# Altium PCB PCB_Facto.PcbDoc (part 2 of 2)
Units mil, origin at the board's own origin, x right, y up, seen from the top; angles counter-clockwise.
Board outline 2860 x 2480 mil, 2 copper layers (Top Layer, Bottom Layer); 83 components, 110 nets, 404 pads, 112 vias.
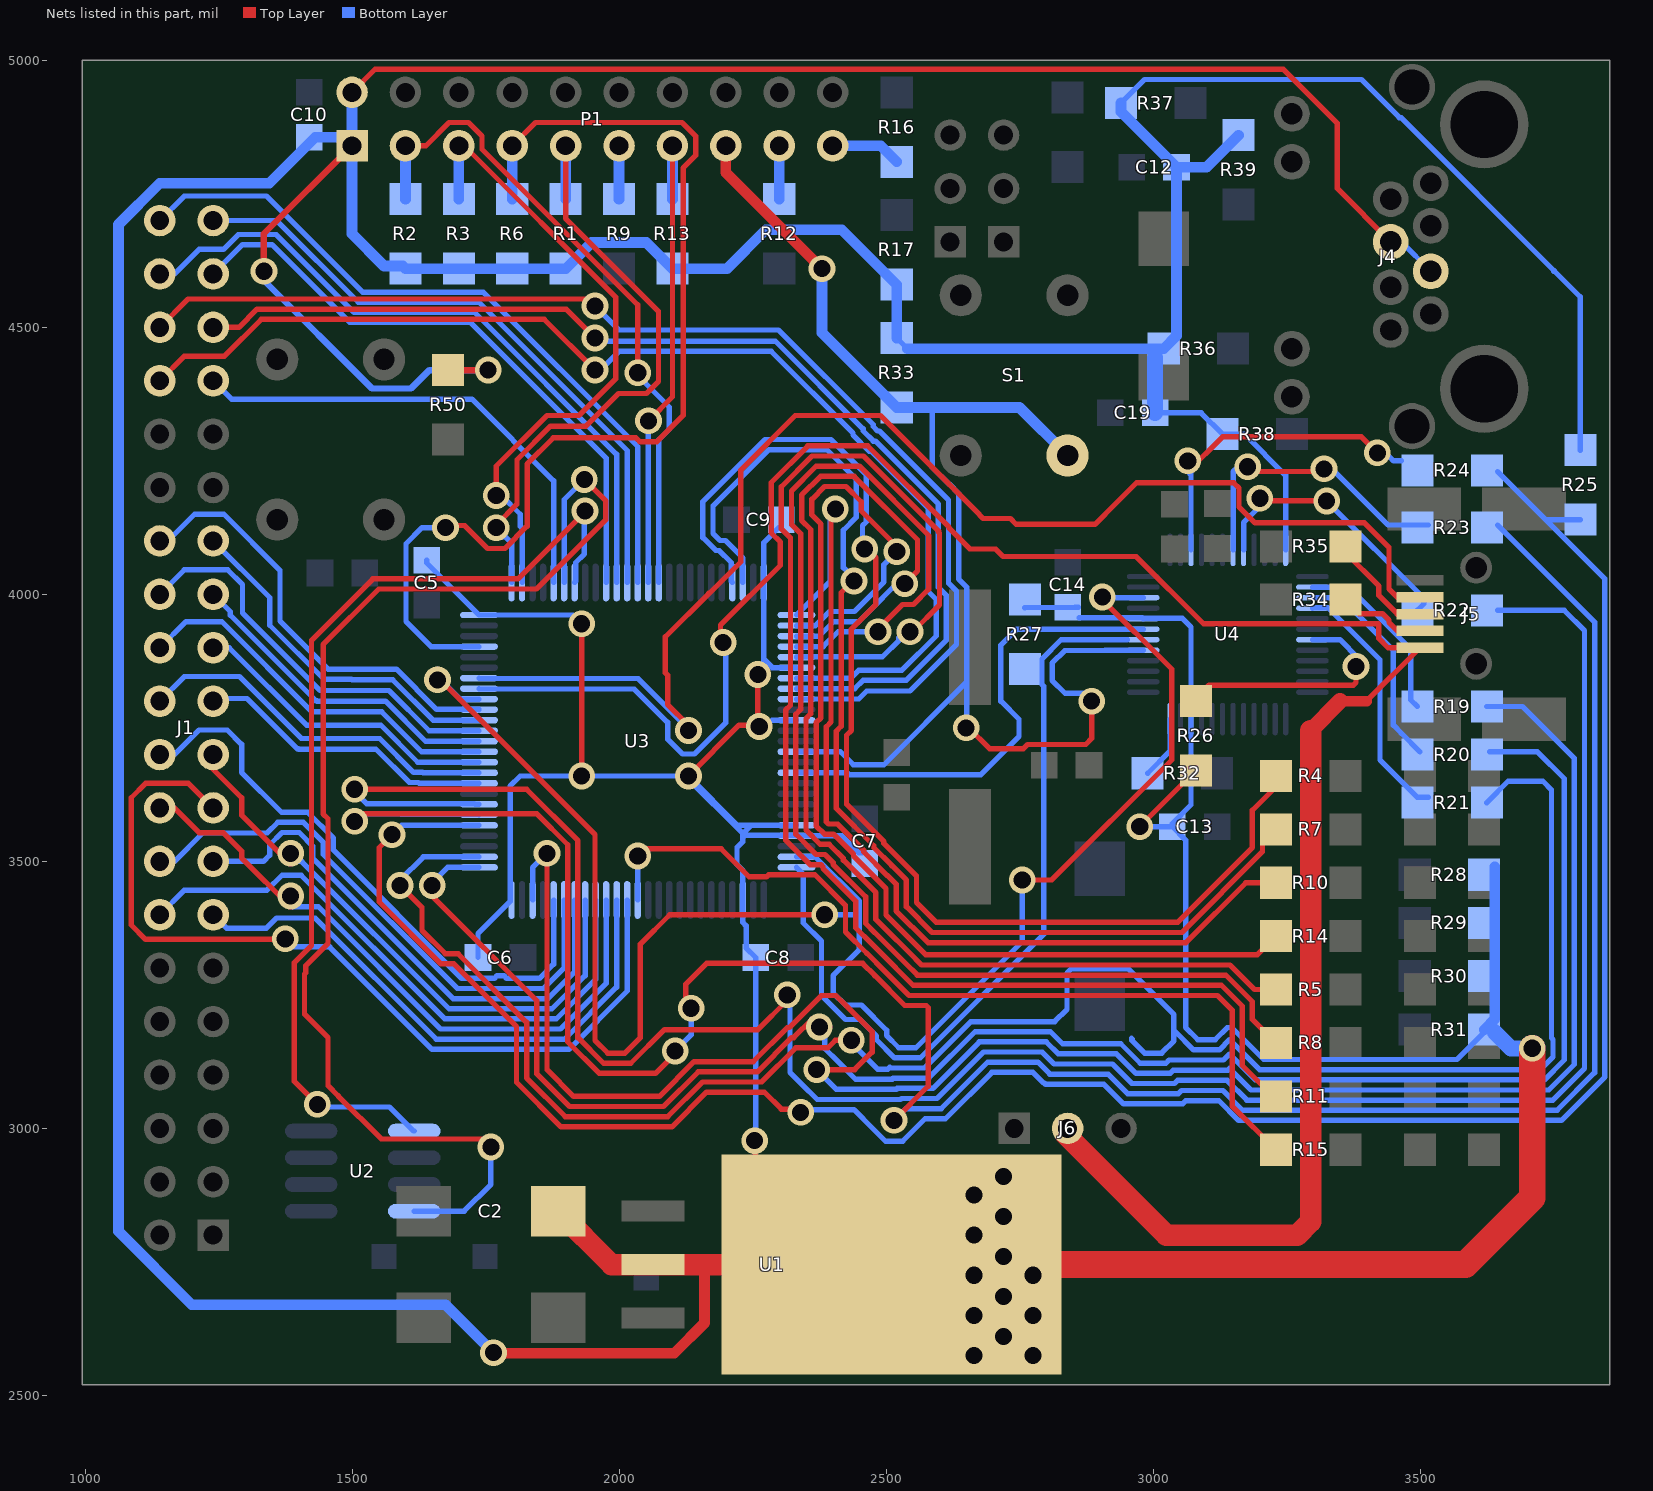
[diagram p2: the nets of this part, all layers, seen from the top]

## Via types
v1: diameter 50, hole 32, Top Layer to Bottom Layer, 111 vias
v2: diameter 50/50 (per signal layer), hole 32, Top Layer to Bottom Layer, 1 vias

## Nets (pads, with @x,y where several pads share a name; then routed paths per layer and width w, separated by ;. In a path a pad name is that pad's centre, name@x,y a point inside that pad or via, vN(x,y) a via of type N, cw(c..) or ccw(c..) an arc to the next point about the centre after c; other vN are vias at no path point) (continued)
NetJ5_1: J5.1 J6.2 U3.68 | length 4222.4
  Top Layer w10: v1(2195,3910) 2190,3915 2190,3942.52 2302,4054.52 2302,4097.87 2285,4114.87 2285,4209.39 2353.61,4278 2465.73,4278 2617.95,4125.78 2617.95,4123.92 2656.87,4085 2705.15,4085 2719.15,4071 2968.39,4071 3094.39,3945 3421.82,3945 3422.71,3944.11 3422.71,3917.29 3440,3900 J5.1@3500,3900 3400,3800
  Top Layer w20: 3350,3800 3400,3800
  Top Layer w30: 3295,3745 3350,3800
  Top Layer w40: J6.2@2835,2990 3025,2800 3270,2800 3295,2825 3295,3745
  Bottom Layer w10: U3.68@1737.76,3823.43 1738.25,3822.93 2028.33,3822.93 2091,3760.26 2091,3728.85 2118.85,3701 2141.15,3701 2200,3759.85 2200,3905.15 2194.85,3910.31 2194.85,3912.13 2195,3912.13 v1(2195,3910)
NetJ5_2: J5.2 R34.1 | length 166.9
  Top Layer w10: R34.1@3360,3990 3386,3964 3429.69,3964 3441.71,3951.98 3441.71,3947.35 3457.56,3931.5 J5.2@3500,3931.5
NetJ5_3: J5.3 R35.1 | length 209.9
  Top Layer w10: R35.1@3360,4090 3360,4078 3422.71,4015.29 3422.71,3997.85 3457.56,3962.99 J5.3@3500,3962.99
NetJ5_4: J5.4 U3.69 | length 2586
  Top Layer w10: v1(2130,3745) 2130,3754.85 2091,3793.85 2091,3848.54 2086.69,3852.85 2086.69,3920.59 2168.11,4002 2168.87,4002 2228,4061.13 2228,4233 2330,4335 2489.34,4335 2674.95,4149.39 2674.95,4148.79 2681.74,4142 2732.85,4142 2743.85,4131 2891,4131 2931,4171 2931,4171.15 2968.85,4209 3150.8,4209 3161,4198.8 3161,4163.85 3190.85,4134 3395.8,4134 3441.71,4088.09 3441.71,4010.34 3457.56,3994.49 J5.4@3500,3994.49
  Bottom Layer w10: U3.69@1737.76,3843.11 1738.44,3842.43 2035.7,3842.43 2130,3748.13 v1(2130,3745)
NetP1_3: P1.3 R2.1 U3.90 | length 1268.3
  Top Layer w10: P1.3@1600,4840 1638.44,4840 1681.97,4883.53 1718.03,4883.53 1743.53,4858.03 1743.53,4833.5 2035,4542.02 v1(2035,4415)
  Bottom Layer w10: v1(2035,4415) 2030,4415 2094,4351 2094,4308.85 2074.37,4289.22 U3.90@2074.37,4022.24
  Bottom Layer w20: R2.1@1600,4740 P1.3@1600,4840
NetP1_5: P1.5 R3.1 U3.77 | length 1199.4
  Top Layer w10: P1.5@1700,4840 1710.15,4840 1994,4556.15 1994,4403.85 1925.15,4335 1865,4335 1770,4240 v1(1770,4185)
  Bottom Layer w10: v1(1770,4185) 1780,4185 1815,4150 1815,4127.37 1818.46,4123.9 U3.77@1818.46,4022.24
  Bottom Layer w20: R3.1@1700,4740 P1.5@1700,4840
NetP1_7: P1.7 R6.1 U3.72 | length 2034.9
  Top Layer w10: v1(1675,4125) 1679,4129 1710.85,4129 1753.85,4086 1786.15,4086 1828,4127.85 1828,4244.26 1876.74,4293 2031.85,4293 2038.85,4286 2071.15,4286 2120,4334.85 2120,4798.44 2143.53,4821.97 2143.53,4858.03 2118.03,4883.53 1843.53,4883.53 P1.7@1800,4840
  Bottom Layer w10: v1(1675,4125) 1631.2,4125 1601,4094.8 1601,3949.2 1648.04,3902.17 U3.72@1737.76,3902.17
  Bottom Layer w20: R6.1@1800,4740 P1.7@1800,4840
NetP1_9: P1.9 R1.1 U3.76 | length 1182.2
  Top Layer w10: v1(1770,4125) 1770,4129.85 1809,4168.85 1809,4252.13 1871.87,4315 1938.13,4315 1999.13,4376 2051.15,4376 2074,4398.85 2074,4529.89 1900,4703.89 P1.9@1900,4840
  Bottom Layer w10: v1@1777.5,4107.5 1787.5,4107.5 1798.78,4096.22 U3.76@1798.78,4022.24
  Bottom Layer w20: R1.1@1900,4740 P1.9@1900,4840
NetP1_11: P1.11 R9.1 | length 100
  Bottom Layer w20: R9.1@2000,4740 P1.11@2000,4840
NetP1_13: P1.13 R13.2 U3.89 | length 936.1
  Top Layer w10: v1(2055,4325) 2100,4370 P1.13@2100,4840
  Bottom Layer w10: U3.89@2055,4022.56 v1(2055,4325)
  Bottom Layer w20: R13.2@2100,4740 P1.13@2100,4840
NetP1_15: P1.15 R33.2 S1.2 U3.14 U4.29 | length 2630.8
  Top Layer w10: v1(2650,3750) 2654.85,3750 2693.85,3711 2757.2,3711 2765.2,3719 2874,3719 2885,3730 v1(2885,3800)
  Top Layer w20: P1.15@2200,4840 2200,4790 v1(2380,4610)
  Bottom Layer w10: U3.14@2332.24,3705.32 2414.53,3705.32 2438.85,3681 2496.15,3681 2651,3835.85 ; 2586.5,4348.5 2586.5,4237.84 2617.84,4206.5 2618.5,4206.5 2636,4189 2636,4028.85 2651,4013.85 2651,3835.85 ; v1(2650,3750) 2651,3751 2651,3835.85 ; v1(2885,3800) 2870.15,3814.85 2835,3814.85 2811,3838.85 2811,3871.15 2834.85,3895 2910,3895 2910.47,3895.47 U4.29@2981.54,3895.47
  Bottom Layer w20: v1(2380,4610) 2380,4490 R33.2@2520,4350 2750,4350 S1.2@2840,4260
NetP1_17: P1.17 R12.2 | length 100
  Bottom Layer w20: R12.2@2300,4740 P1.17@2300,4840
NetP1_19: P1.19 R16.2 | length 132.4
  Bottom Layer w20: P1.19@2400,4840 2490,4840 R16.2@2520,4810
NetR4_2: R4.2 U3.97 | length 2309.1
  Top Layer w10: v1(2460,4085) 2461,4086 2464,4086 2481,4069 2481,3981 2469,3969 2468.85,3969 2435,3935.15 2435,3745.15 2426,3736.15 2426,3607.09 2496,3537.09 2496,3533.85 2518.85,3511 2519,3511 2557,3473 2557,3423.11 2594.18,3385.93 3045.93,3385.93 3186,3526 3186,3595.8 3230,3639.8 R4.2@3230,3660
  Bottom Layer w10: U3.97@2212.17,4022.24 2210.39,4024.02 2210.39,4059.19 2187.57,4082 2181.33,4082 2157,4106.33 2157,4173.67 2273.33,4290 2396.87,4290 2463,4223.87 2463,4135.98 2456,4128.98 2456,4089 v1(2460,4085)
NetR5_2: R5.2 U3.3 | length 2294.1
  Top Layer w10: v1(2535,4020) 2559,4044 2559,4102.26 2440.26,4221 2377.22,4221 2342,4185.78 2342,4138.48 2359,4121.48 2359,3776.63 2350,3767.63 2350,3558.74 2376.82,3531.92 2393.69,3531.92 2420,3505.61 2420,3502.37 2481,3441.37 2481,3391.52 2487.52,3385 2487.63,3385 2555,3317.63 2555,3317.52 2566.52,3306 3144,3306 3190,3260 R5.2@3230,3260
  Bottom Layer w10: U3.3@2332.24,3921.85 2374.98,3921.85 2402.13,3949 2448.85,3949 2468.85,3969 2469,3969 2520,4020 v1@2540,4020
NetR7_2: R7.2 U3.98 | length 2198.7
  Top Layer w10: v1(2440,4025) 2438,4025 2416,4003 2416,3753.02 2407,3744.02 2407,3599.22 2477,3529.22 2477,3525.98 2510.98,3492 2511.13,3492 2538,3465.13 2538,3415.24 2586.31,3366.93 3053.8,3366.93 3205,3518.13 3205,3538.13 3226.87,3560 R7.2@3230,3560
  Bottom Layer w10: U3.98@2231.85,4022.24 2231.85,4068.15 2199,4101 2189.2,4101 2176,4114.2 2176,4165.8 2281.2,4271 2389,4271 2444,4216 2444,4143.85 2421.15,4121 2421,4121 2420,4120 2420,4050 2440,4030 v1(2440,4025)
NetR8_2: R8.2 U3.4 | length 2495.5
  Top Layer w10: v1(2485,3930) 2485,3935 2531,3981 2551.15,3981 2580,4009.85 2580,4105.15 2579.95,4105.21 2579.95,4110.04 2449.99,4240 2369.35,4240 2323,4193.65 2323,4130.61 2340,4113.61 2340,3784.5 2331,3775.5 2331,3550.87 2368.95,3512.92 2385.82,3512.92 2401,3497.74 2401,3494.5 2462,3433.5 2462,3383.65 2479.65,3366 2479.76,3366 2536,3309.76 2536,3309.65 2558.65,3287 3136.13,3287 3186,3237.13 3186,3204 R8.2@3230,3160
  Bottom Layer w10: U3.4@2332.24,3902.17 2382.17,3902.17 2410,3930 v1@2490,3930
NetR10_2: R10.2 U3.1 | length 1818.5
  Top Layer w10: v1@2397,4147 2397,3760.89 2388,3751.89 2388,3574.48 2392.56,3569.92 2409.43,3569.92 2458,3521.35 2458,3518.11 2503.11,3473 2503.26,3473 2519,3457.26 2519,3407.37 2578.44,3347.93 3061.67,3347.93 3173.74,3460 R10.2@3230,3460
  Bottom Layer w10: U3.1@2332.24,3961.22 2395,4023.98 2395,4150 v1(2405,4160)
NetR11_2: R11.2 U3.5 | length 2712.2
  Top Layer w10: v1(2545,3930) 2550,3930 2600,3980 2600,4115 2598.95,4116.05 2598.95,4117.91 2457.86,4259 2361.48,4259 2304,4201.52 2304,4122.74 2321,4105.74 2321,3792.37 2312,3783.37 2312,3539.87 2357.95,3493.92 2377.95,3493.92 2382,3489.87 2382,3486.63 2443,3425.63 2443,3375.78 2471.78,3347 2471.89,3347 2517,3301.89 2517,3301.78 2550.78,3268 3128.26,3268 3167,3229.26 3167,3118 3225,3060 R11.2@3230,3060
  Bottom Layer w10: U3.5@2332.24,3882.48 2332.93,3883.17 2493.32,3883.17 2524,3913.85 2524,3919 2535,3930 v1(2545,3930)
NetR14_2: R14.2 U3.2 | length 2128.4
  Top Layer w10: v1(2520,4080) 2520,4090 2453.5,4156.5 2453.5,4173.41 2424.91,4202 2385.09,4202 2361,4177.91 2361,4148.85 2378,4131.85 2378,3768.76 2369,3759.76 2369,3566.61 2384.69,3550.92 2401.56,3550.92 2439,3513.48 2439,3510.24 2500,3449.24 2500,3399.5 2574.5,3325 3195,3325 R14.2@3230,3360
  Bottom Layer w10: U3.2@2332.24,3941.54 2367.8,3941.54 2394.26,3968 2440.98,3968 2496,4023.02 2496,4056 v1(2520,4080)
NetR15_2: R15.2 U3.38 | length 1653.8
  Top Layer w10: v1(2035,3510) 2048.45,3523.45 2191.39,3523.45 2243.85,3471 2276.15,3471 2280.08,3474.92 2366.83,3474.92 2424,3417.76 2424,3367.91 2463.91,3328 2464.02,3328 2498,3294.02 2498,3293.91 2542.91,3249 3120.39,3249 3148,3221.39 3148,3042 R15.2@3230,2960
  Bottom Layer w10: U3.38@2035,3427.76 v1(2035,3510)
NetR19_1: R19.1 U3.48 | length 3728.1
  Top Layer w10: v1(1865,3515) 1865,3110 1915,3060 2075.5,3060 2140.5,3125 2251.26,3125 2315.26,3189 2319.15,3189 2336,3205.85 2336,3206.15 2378.85,3249 2405.85,3249 2423.85,3231 2424.15,3231 2474,3181.15 2474,3142.85 2441.15,3110 v1(2370,3110) v1@2379.69,3110
  Bottom Layer w10: U3.48@1838.15,3427.76 1838.15,3488.15 v1(1865,3515) ; v1@2379.69,3110 v1(2370,3110) 2407,3073 2519.26,3073 2521.26,3075 2587.63,3075 2674.63,3162 2800.05,3162 2822.52,3139.53 2931.58,3139.53 2968.11,3103 3031.89,3103 3037.89,3109 3139.76,3109 3143.19,3112.42 3183.61,3072 3740.89,3072 3789,3120.11 3789,3692.87 3691.87,3790 R19.1@3625,3790
NetR19_2: R19.2 U4.2 | length 344.8
  Bottom Layer w10: U4.2@3298.46,4013.58 3366.42,4013.58 3482.5,3897.5 3482.5,3802.5 R19.2@3495,3790
NetR20_1: R20.1 U3.51 | length 3442.8
  Top Layer w10: v1(1650,3455) 1650,3435 1846,3239 1846,3102.13 1907.13,3041 2083.37,3041 2148.37,3106 2259.13,3106 2323.13,3170 2327.02,3170 2362.02,3205 v1@2375,3205 ; v1(2375,3190) v1@2395,3190
  Bottom Layer w10: v1@1645,3440 1645,3455 1678.78,3488.78 U3.51@1737.76,3488.78 ; v1(2375,3190) 2385,3180 2385,3150 2386,3149 2386.15,3149 2409,3126.15 2409,3126 2443,3092 2511.39,3092 2513.39,3094 2579.76,3094 2666.76,3181 2807.92,3181 2830.39,3158.53 2939.45,3158.53 2975.98,3122 3024.02,3122 3030.02,3128 3131.89,3128 3143.19,3139.29 3191.48,3091 3733.02,3091 3770,3127.98 3770,3655 3720,3705 R20.1@3630,3705
NetR20_2: R20.2 U4.3 | length 403.5
  Bottom Layer w10: U4.3@3298.46,3993.9 3351.1,3993.9 3450,3895 3450,3755.2 3465.2,3740 3465,3740 R20.2@3500,3705
NetR21_1: R21.1 U3.52 | length 3800.6
  Top Layer w10: v1(1590,3455) 1631,3414 1631,3370.87 1674.87,3327 1698.61,3327 1827,3198.61 1827,3094.26 1899.26,3022 2091.24,3022 2156.24,3087 2267,3087 2331,3151 2391.15,3151 2405.15,3165 v1(2435,3165)
  Bottom Layer w10: v1@1590,3465 1633.46,3508.46 U3.52@1737.76,3508.46 ; v1(2435,3165) 2435,3160 2484,3111 2503.52,3111 2506.81,3114.29 2508.11,3113 2571.89,3113 2658.89,3200 2815.79,3200 2838.76,3222.96 2838.76,3291 2846.96,3299.2 2953.04,3299.2 3039,3213.24 3039,3163.85 ; R21.1@3625,3610 3665,3650 3730,3650 3746,3634 3746,3169.15 3749,3166.15 3749,3133.85 3725.15,3110 3199.35,3110 3143.19,3166.16 3124.02,3147 3075.98,3147 3042,3180.98 3040.98,3180.98 3039,3179 3039,3163.85 ; 2983.85,3141 2961,3163.85 2961,3167.47 2959.63,3168.83 2959.63,3165.21 2983.85,3141 ; 2983.85,3141 3016.15,3141 ; 2983.85,3141 3016.15,3141 ; 3016.15,3141 3039,3163.85 ; 3016.15,3141 3039,3163.85
NetR21_2: R21.2 U4.4 | length 473.7
  Bottom Layer w10: U4.4@3298.46,3974.21 3299.15,3974.9 3327.61,3974.9 3425,3877.51 3425,3690 3495,3620 R21.2@3515,3620
NetR22_1: R22.1 U3.57 | length 4303.3
  Top Layer w10: v1(1505,3635) 1827.02,3635 1923,3539.02 1923,3169.98 1970.98,3122 2022,3122 2085,3185 2260,3185 2315,3240 v1(2315,3250)
  Bottom Layer w10: v1(1505,3635) 1505,3630 1521,3614 1521.15,3614 1527.15,3608 1729.46,3608 1730.57,3606.89 U3.57@1737.76,3606.89 ; v1(2315,3250) 2320,3245 2320,3104.85 2355.85,3069 2356.15,3069 2371.15,3054 2527.13,3054 2529.13,3056 2595.5,3056 2682.5,3143 2792.18,3143 2814.65,3120.53 2923.71,3120.53 2960.24,3084 3039.76,3084 3045.76,3090 3138.74,3090 3175.74,3053 3748.76,3053 3808,3112.24 3808,3932 3770,3970 R22.1@3645,3970
NetR22_2: R22.2 U4.44 | length 521.5
  Top Layer w10: v1(3200,4180) 3205,4175 v1(3325,4175)
  Bottom Layer w10: U4.44@3169.53,4083.46 3169.53,4134.53 3200,4165 v1(3200,4180) ; v1(3325,4175) 3506.87,3993.13 3506.87,3981.87 R22.2@3495,3970
NetR23_1: R23.1 U3.56 | length 4721.2
  Top Layer w10: v1(1505,3575) 1505,3580 1514,3589 1846.15,3589 1904,3531.15 1904,3162.11 1963.11,3103 2068,3103 v1@2120,3155 ; v1(2135,3225) 2125,3225 2125,3270 2164,3309 2456.15,3309 2479,3286.15 2479,3286.04 2535.04,3230 2575,3230 2579,3226 2579,3079 v1(2515,3015)
  Bottom Layer w10: v1(1505,3575) 1519,3589 1591.15,3589 1592.26,3587.89 1737.07,3587.89 U3.56@1737.76,3587.2 ; v1(2105,3145) 2135,3175 v1(2135,3225) ; v1(2515,3015) 2537,3037 2603.37,3037 2690.37,3124 2784.31,3124 2806.78,3101.53 2915.84,3101.53 2952.37,3065 3047.63,3065 3053.63,3071 3130.87,3071 3167.87,3034 3756.63,3034 3827,3104.37 3827,3948 R23.1@3645,4130
NetR23_2: R23.2 U4.43 | length 596.7
  Top Layer w10: v1@3159,4239 v1(3177.08,4239) ; v1@3172.5,4237.5 3180,4230 3320,4230 3325,4235 v1(3320,4235)
  Bottom Layer w10: U4.43@3149.84,4083.46 3150,4083.62 3150,4230 3159,4239 v1(3177.08,4239) ; v1(3320,4235) 3335,4235 3440,4130 R23.2@3515,4130
NetR24_1: R24.1 R25.1 U3.55 | length 4311.4
  Top Layer w10: v1(1575,3550) 1551,3526 1551,3424 1667,3308 1690.74,3308 1808,3190.74 1808,3086.39 1891.39,3003 2099.11,3003 2164.11,3068 2271.85,3068 2303.85,3036 v1@2334,3036
  Bottom Layer w10: v1(1575,3550) 1592.52,3567.52 U3.55@1737.76,3567.52 ; v1@2335,3035 2440,3035 2476,2999 2476,2998.85 2498.85,2976 2531.15,2976 2573.15,3018 2611.24,3018 2698.24,3105 2775,3105 2795,3085 2796.44,3085 2798.91,3082.53 2907.97,3082.53 2944.5,3046 3055.5,3046 3061.5,3052 3123,3052 3160,3015 3764.5,3015 3846,3096.5 3846,4029 3735,4140 ; R24.1@3645,4230 3735,4140 ; R25.1@3800,4140 3735,4140
  other v1: 2340,3030
NetR24_2: R24.2 U4.39 | length 654.2
  Top Layer w10: v1(3065,4250) 3065,4230 3130,4295 3390,4295 v1(3420,4265)
  Bottom Layer w10: v1(3065,4250) 3065,4230 3071.1,4223.9 ; U4.39@3071.1,4083.46 3071.1,4223.9 ; v1@3071.1,4243.9 3071.1,4223.9 ; v1@3420.19,4265.19 3427.69,4257.69 3442.6,4257.69 3450.29,4250 3464.71,4250
NetR26_1: R26.1 U4.7 | length 467.7
  Top Layer w10: R26.1@3075,3800 3105,3830 3375,3830 3380,3835 v1(3380,3865)
  Bottom Layer w10: U4.7@3298.46,3915.16 3349.84,3915.16 3385,3880 3385,3870 v1(3380,3865)
NetR27_1: R27.1 U3.25 U4.30 | length 1515.5
  Bottom Layer w10: U3.25@2332.24,3488.78 2345,3476.02 2345,3384.8 2379,3350.8 2379,3248.98 2423.98,3204 2451.15,3204 2482,3173.15 2482,3165.98 2515.98,3132 2564.02,3132 2795,3362.98 2795,3827.98 2792,3830.98 2792,3879.02 2828.13,3915.16 U4.30@2951.7,3915.16
NetR32_2: R32.2 U4.24 | length 118.8
  Bottom Layer w10: R32.2@2990,3665 3031.73,3706.73 U4.24@3031.73,3766.54
NetU2_1: U2.1 U3.82 | length 1871.1
  Top Layer w10: v1@1425,3055 v1(1435,3045) 1392,3088 1392,3310.43 1424,3342.43 1424,3914 1539,4029 1810.87,4029 1936.2,4154.33 v1(1936.2,4156)
  Bottom Layer w10: v1(1435,3045) 1440,3040 1570.02,3040 1615.02,2995 U2.1@1616.46,2995 ; U3.82@1916.89,4022.24 1918.67,4024.02 1918.67,4059.19 1935,4075.52 v1@1935,4156
NetU2_4: U2.4 U3.81 | length 2418.1
  Top Layer w10: v1(1760,2965) 1760,2980 1555,2980 1474,3061 1474,3061.15 1455,3080.15 1455,3169.85 1411,3213.85 1411,3288.98 1413.59,3291.57 1413.59,3305.15 1455,3346.57 1455,3579.85 1446,3588.85 1446,3906 1550,4010 1845.36,4010 1975.2,4139.85 1975.2,4174.8 v2(1935,4215)
  Bottom Layer w10: U2.4@1616.46,2845 1710,2845 1760,2895 1760,2980 v1(1760,2965) ; U3.81@1897.2,4022.24 1897.2,4177.2 v2(1935,4215)
NetU3_16: U3.16 U4.31 | length 912.4
  Bottom Layer w10: U3.16@2332.27,3665.92 2427.05,3665.92 2430.98,3662 2677.15,3662 2749,3733.85 2749,3766.15 2715,3800.15 2715,3905 2745,3935 2910.5,3935 2910.66,3934.84 U4.31@2981.54,3934.84
NetU3_24: U3.24 U3.67 U4.34 | length 3384.4
  Top Layer w10: v1@1662.5,3842.5 1955,3550 1955,3164.85 1978.85,3141 2011.15,3141 2040,3169.85 2040,3345 2095,3400 v1(2385,3400) ; v1(2755,3465) 2810,3465 3035,3690 3035,3860 v1@2900,3995
  Bottom Layer w10: v1(1660,3840) v1@1660,3860 ; v1@1663.17,3843.17 1702.59,3803.74 U3.67@1737.76,3803.74 ; U3.24@2332.24,3508.46 2367.41,3508.46 2450,3425.87 2450,3400 ; v1(2385,3400) 2450,3400 ; v1(2755,3465) 2755,3349.85 2556.15,3151 2523.85,3151 2501,3173.85 2501,3183.85 2453.85,3231 2423.85,3231 2401,3253.85 2401,3286.15 2450,3335.15 2450,3400 ; v1@2900,3993.9 U4.34@2981.54,3993.9
  other v1: 2905,3995
PC12: J1.33 U3.80 | length 905.4
  Bottom Layer w10: J1.33@1240,4400 1274.5,4365.5 1724.5,4365.5 1877.52,4212.48 U3.80@1877.52,4022.24
PC13: J1.34 U3.7 | length 2203.9
  Top Layer w10: J1.34@1140,4400 1186.09,4446.09 1261.09,4446.09 1330,4515 1860,4515 v1(1955,4420)
  Bottom Layer w10: v1(1955,4420) 1965,4420 2000,4455 2285,4455 2438,4302 2438,4298.46 2468.46,4268 2472,4268 2579,4161 2579,4005.24 2594,3990.24 2594,3922.13 2529.87,3858 2449.11,3858 2434.22,3843.11 U3.7@2332.24,3843.11
PC14: J1.35 U3.8 | length 2092.1
  Top Layer w10: J1.35@1240,4500 1288.13,4500 1322.13,4534 1901,4534 v1(1955,4480)
  Bottom Layer w10: v1@1965,4474 2292.87,4474 2457,4309.87 2457,4306.33 2476.33,4287 2479.87,4287 2598,4168.87 2598,4013.11 2613,3998.11 2613,3914.26 2537.74,3839 2456.98,3839 2441.4,3823.43 U3.8@2332.24,3823.43
PC15: J1.36 U3.9 | length 2275.7
  Top Layer w10: J1.36@1140,4500 1193,4553 1942,4553 v1(1955,4540)
  Bottom Layer w10: v1(1955,4540) 2000,4495 2298.74,4495 2476,4317.74 2476,4314.2 2484.2,4306 2487.74,4306 2617,4176.74 2617,4020.98 2632,4005.98 2632,3906.39 2544.61,3819 2463.85,3819 2448.85,3804 2332.5,3804 U3.9@2332.24,3803.74
PD4: J1.37 U3.85 | length 1157.2
  Bottom Layer w10: J1.37@1240,4600 1295,4655 1350,4655 1496,4509 1721.94,4509 1975.94,4255 U3.85@1975.94,4022.24
PD5: J1.38 U3.86 | length 1296.8
  Bottom Layer w10: J1.38@1140,4600 1167.54,4600 1213.63,4646.09 1259.22,4646.09 1287.13,4674 1357.87,4674 1503.87,4528 1729.81,4528 1995.63,4262.18 U3.86@1995.63,4022.24
PD6: J1.39 U3.87 | length 1200.8
  Bottom Layer w10: J1.39@1240,4700 1358.74,4700 1511.74,4547 1737.68,4547 2015.32,4269.37 U3.87@2015.32,4022.24
PD7: J1.40 U3.88 | length 1362.8
  Bottom Layer w10: J1.40@1140,4700 1186,4746 1339.61,4746 1519.61,4566 1745.55,4566 2035,4276.55 U3.88@2035,4022.24
PE8: J1.17 U3.39 | length 1701
  Top Layer w10: J1.17@1240,3600 1193.91,3646.09 1113.63,3646.09 1086.63,3619.09 1086.63,3380.91 1113.63,3353.91 1371.09,3353.91 1385,3340 1385,3345 v1(1375,3355)
  Bottom Layer w10: v1(1375,3355) 1385,3345 1385,3340 1458.11,3340 1650.11,3148 1906.09,3148 2015.32,3257.23 U3.39@2015.32,3427.76
PE10: J1.18 U3.41 | length 1243.4
  Top Layer w10: J1.18@1140,3600 1167.54,3600 1213.63,3553.91 1258.55,3553.91 1293.37,3519.09 1293.37,3506.63 1385,3415 v1(1385,3435)
  Bottom Layer w10: v1(1385,3435) 1385,3420 1390,3415 1436.85,3415 1665.85,3186 1890.35,3186 1975.94,3271.59 U3.41@1975.94,3427.76
PE12: J1.19 U3.43 | length 1134.3
  Top Layer w10: J1.19@1240,3700 1240,3672.46 1293.37,3619.09 1293.37,3586.63 1385,3495 1384.39,3495 1385,3495.61 v1(1385,3515)
  Bottom Layer w10: v1(1385,3515) 1385,3500 1405.59,3500 1681.59,3224 1874.61,3224 1936.57,3285.96 U3.43@1936.57,3427.76
PE15: J1.20 U3.46 | length 1128.6
  Bottom Layer w10: J1.20@1140,3700 1167.54,3700 1213.63,3746.09 1266.37,3746.09 1293.37,3719.09 1293.37,3666.63 1368,3592 1416.89,3592 1465,3543.89 1465,3521.2 1705.2,3281 1766.8,3281 1771.8,3286 1784.2,3286 1789.2,3281 1851,3281 1877.52,3307.52 U3.46@1877.52,3427.76
T1_CH1: J1.13 U3.40 | length 1071.6
  Bottom Layer w10: J1.13@1240,3400 1265.05,3374.95 1339.8,3374.95 1358.85,3394 1430.98,3394 1657.98,3167 1898.22,3167 1995.63,3264.41 U3.40@1995.63,3427.76
T1_CH2: J1.14 U3.42 | length 1137.9
  Bottom Layer w10: J1.14@1140,3400 1186.09,3446.09 1340.93,3446.09 1368.85,3474 1404.72,3474 1673.72,3205 1882.48,3205 1956.26,3278.78 U3.42@1956.26,3427.76
T1_CH3: J1.15 U3.44 | length 1008.1
  Bottom Layer w10: J1.15@1240,3500 1334.24,3500 1346,3511.76 1346,3531.15 1368.85,3554 1401.15,3554 1427,3528.15 1427,3505.46 1689.46,3243 1866.74,3243 1916.89,3293.15 U3.44@1916.89,3427.76
T1_CH4: J1.16 U3.45 | length 1072.9
  Bottom Layer w10: J1.16@1140,3500 1167.54,3500 1220.54,3553 1340.98,3553 1360.98,3573 1409.02,3573 1446,3536.02 1446,3513.33 1697.33,3262 1858.87,3262 1897.2,3300.33 U3.45@1897.2,3427.76
T3_CH1: J1.25 U3.63 | length 615.7
  Bottom Layer w10: J1.25@1240,4000 1272,3968 1272,3961.13 1432.13,3801 1434,3801 1435,3800 1562.48,3800 1637.48,3725 U3.63@1737.76,3725
T3_CH2: J1.26 U3.64 | length 772.8
  Bottom Layer w10: J1.26@1140,4000 1186.09,4046.09 1267.04,4046.09 1295,4018.13 1295,3965 1440,3820 1569.35,3820 1644.66,3744.69 U3.64@1737.76,3744.68
T3_CH3: J1.27 U3.65 | length 667.2
  Bottom Layer w10: J1.27@1240,4100 1346,3994 1346,3942.13 1447.13,3841 1499,3841 1500,3840 1576.22,3840 1651.85,3764.37 U3.65@1737.76,3764.37
T3_CH4: J1.28 U3.66 | length 825.7
  Bottom Layer w10: J1.28@1140,4100 1155,4100 1205,4150 1260,4150 1365,4045 1365,3950 1455,3860 1583.09,3860 1658.35,3784.74 1737.07,3784.74 U3.66@1737.76,3784.06
T4_CH1: J1.21 U3.59 | length 565.6
  Bottom Layer w10: J1.21@1240,3800 1245,3805 1303.13,3805 1397.13,3711 1399,3711 1400,3710 1545,3710 1607.37,3647.63 1624.24,3647.63 1625.61,3646.26 U3.59@1737.76,3646.26
T4_CH2: J1.22 U3.60 | length 691.5
  Bottom Layer w10: J1.22@1140,3800 1186.09,3846.09 1288.91,3846.09 1405,3730 1551.87,3730 1615.24,3666.63 1632.11,3666.63 1632.8,3665.94 U3.60@1737.76,3665.94
T4_CH3: J1.23 U3.61 | length 586.6
  Bottom Layer w10: J1.23@1240,3900 1270,3900 1415,3755 1553.74,3755 1623.11,3685.63 U3.61@1737.76,3685.63
T4_CH4: J1.24 U3.62 | length 719
  Bottom Layer w10: J1.24@1140,3900 1189,3949 1256,3949 1425,3780 1555.61,3780 1630.29,3705.32 U3.62@1737.76,3705.32
VCC: C2.1 C5.2 C6.2 C7.2 C8.2 C9.2 C10.2 C12.2 C13.2 C14.2 C19.2 J4.4 J4.5 P1.1 P1.2 R1.2 R2.2 R3.2 R6.2 R13.1 R17.1 R25.2 R26.2 R27.2 R28.2 R29.2 R30.1 R31.2 R33.1 R36.1 R37.1 R38.2 R39.1 R50.1 U1.2 U1.4 U3.6 U3.11 U3.21 U3.22 U3.28 U3.50 U3.75 U3.100 U4.22 U4.32 U4.48 | length 19326.2
  Top Layer w10: P1.2@1500,4940 1543.53,4983.53 3243.6,4983.53 3345,4882.12 3345,4760 J4.4@3445,4660 ; v1(1930,3660) v1(1930,3945) ; v1(2130,3660) 2225,3755 v1@2260,3755 ; v1(2254,2976.95) 2254,2989 2255,2990 U1.4@2255,2925 ; v1(2260,3850) v1@2260,3755 ; v1(2262.58,3752.42) v1@2260,3755 ; v1(2975,3565) R26.2@3080,3670
  Top Layer w12: v1(1335,4605) 1335,4675 P1.1@1500,4840 ; R50.1@1680,4420 v1(1755,4420)
  Top Layer w20: v1(1765,2580) 1766.24,2578.76 2103.15,2578.76 2160,2635.61 2160,2745
  Top Layer w40: C2.1@1885.98,2845 1985.98,2745 U1.2@2063.78,2745 2160,2745 U1.4@2435,2745
  Top Layer w50: U1.4@2510,2745 3585,2745 3710,2870 v1(3710,3150)
  Bottom Layer w10: C5.2@1640,4064 1640,4058.98 U3.75@1737.76,3961.22 1913.78,3961.22 v1(1930,3945) ; C6.2@1736,3320 1736,3364.98 1796,3424.98 1796,3641 1815,3660 2123.7,3660 2231.85,3551.85 ; v1(2130,3660) 2130,3659.85 2222.33,3567.52 2247.52,3567.52 ; v1(2254,2976.95) 2254,2989 2256,2991 C8.2@2256,3320 2238,3338 2238,3379.26 2231.85,3385.41 2231.85,3427.76 2231.85,3483 2221,3493.85 2221,3526.15 2231.85,3537 2231.85,3545 ; v1(2260,3850) 2265,3850 2271.22,3856.22 2271.22,3878.78 ; v1(2262.58,3752.42) 2274.96,3752.42 2286.91,3764.37 U3.11@2332.24,3764.37 ; C9.2@2299,4125 2271.22,4097.22 U3.100@2271.22,4022.24 2271.22,3878.78 ; U3.21@2332.24,3567.52 2247.52,3567.52 ; U3.6@2332.24,3862.8 2287.2,3862.8 2271.22,3878.78 ; C7.2@2460,3516 2449,3516 2417.17,3547.83 U3.22@2332.24,3547.83 2331.08,3549 2235.85,3549 2231.85,3545 ; R33.1@2520,4480 R33.1@2540,4460 ; R27.2@2760,3975 2860,3976 C14.2@2854,3976 ; C14.2@2862,3956 2980.06,3956 U4.32@2981.54,3954.53 2982.01,3955 3055,3955 3071.1,3938.9 U4.22@3071.1,3766.54 3071.1,3606.1 3036,3571 C13.2@3036,3565 ; R37.1@2940,4920 2984,4964 3389.96,4964 3461.26,4892.69 3464.43,4892.69 3751.06,4606.06 ; v1(2975,3565) C13.2@3036,3565 ; C19.2@3004,4340 3090,4340 R38.2@3130,4300 3171.24,4300 3248.27,4222.97 U4.48@3248.27,4083.46 ; R36.1@3004,4444 R36.1@3020,4460 ; J4.4@3445,4660 3465,4660 J4.5@3520,4605 ; R31.2@3640,3180 3640,3200 3569,3129 3207.22,3129 3147.37,3188.85 3139,3188.85 3116.15,3166 3083.85,3166 3061,3188.85 3061,3540 C13.2@3036,3565 ; 3750,4605 3751.06,4606.06 ; R25.2@3800,4270 3800,4557.12 3751.06,4606.06 ; 2231.85,3545 2231.85,3551.85 ; 2231.85,3551.85 2247.52,3567.52
  Bottom Layer w12: v1(1335,4605) 1335,4587.93 1537.43,4385.5 1610.5,4385.5 1645,4420 v1(1755,4420)
  Bottom Layer w20: P1.2@1500,4940 P1.1@1500,4840 ; v1(1765,2580) 1675,2670 1200,2670 1062.63,2807.37 1062.63,4692.63 1140,4770 1345,4770 1431,4856 1484,4856 P1.1@1500,4840 ; R33.1@2520,4480 R17.1@2520,4580 2417,4683 2275,4683 2202,4610 R13.1@2100,4610 2051,4659 1949,4659 R1.2@1900,4610 R6.2@1800,4610 R3.2@1700,4610 R2.2@1600,4610 1595,4615 1560,4615 1500,4675 P1.1@1500,4840 ; R33.1@2540,4460 R36.1@3020,4460 3044,4484 C12.2@3044,4800 ; R37.1@2940,4920 2940,4904 C12.2@3044,4800 ; R39.1@3160,4860 3100,4800 C12.2@3044,4800 ; R31.2@3620,3185 3640,3205 3640,3445 R28.2@3640,3490
  Bottom Layer w30: C19.2@3004,4340 R36.1@3004,4444 ; R31.2@3640,3180 3670,3150 v1(3710,3150)
  other v1: 2665,2575 2775,2575 2720,2610 2665,2650 2775,2650 2720,2685 2665,2725 2775,2725 2720,2760 2665,2800 2720,2835 2665,2875 2720,2910
pads on no net: J4.7 J4.FIX1 J4.FIX2 J4.FIX3 J4.FIX4 J5.10 J5.11 S1.3 S1.4 S2.3 S2.4 U2.5 U3.15 U3.23 U3.26 U3.33 U3.34 U3.47 U3.53 U3.54 U3.73 U3.83 U3.84 U3.93 U3.95 U3.96 U4.1 U4.5 U4.6 U4.8 U4.9 U4.10 U4.11 U4.12 U4.20 U4.21 U4.25 U4.27 U4.33 U4.38 U4.40 U4.41 U4.42 U4.45 U4.46

## Polygon pours and split planes (outlines as drawn)
GND on Top Layer "GND" (solid, remove dead copper, pour order 1000): 995,5000 3855,5000 3855,2520 995,2520
GND on Bottom Layer "GND" (solid, remove dead copper, pour order 1001): 995,5000 3855,5000 3855,2520 995,2520

## Other copper
Bottom Layer:
  region net VCC: 2645,2900 2695,2950 2975,2950 3050,2875 3225,2875 3225,2540 2645,2540

## Silkscreen, mask and mechanical layers (free items; w line width, h text height)
Top Overlay:
  drawing of 1938 lines, arcs and shapes, not listed
  text "B0" at 2692,4951 h60
  text "B1" at 2586,4950 h60
  text "Flash" at 2790,4845 h50
  text "Sys" at 2475,4840 h50
  text "Sys/RAM" at 2785,4650 h35
  text "RAM" at 2455,4645 h50
  text "GND" at 1050,4640 h60 r90
  text "PE0" at 3739,3640 h60
  text "PE1" at 3745,3540 h60
  text "PE2" at 3739,3440 h60
  text "PE3" at 3739,3340 h60
  text "PE4" at 3738,3240 h60
  text "PE5" at 3738,3140 h60
  text "USB OTG" at 2705,3070 h60
  text "PE6" at 3739,3040 h60
  text "S" at 2645,2980 h50
  text "H" at 3010,2980 h50
  text "PE7" at 3739,2935 h60
  text "Carte CPU Prototype 2" at 3035,2835 h70
  text "Gwenn & Jacen" at 3035,2755 h70
  text "GND" at 1050,2745 h60 r90
  text "Robot ESEO 2010" at 3035,2670 h70
  text "Alimentation" at 1554,2560 h60 r90
Bottom Overlay:
  drawing of 1727 lines, arcs and shapes, not listed
  text "MCP2551" at 1670,3050 h30
  text "VCC" at 3210,2896 h60
Top Solder:
  region: 995,5000 1350,5000 1350,4815 1310,4775 995,4775
  region: 990,2720 1430,2720 1480,2670 1480,2515 990,2515
Bottom Solder:
  region: 2645,2900 2695,2950 2975,2950 3050,2875 3225,2875 3225,2540 2645,2540
Drill Drawing:
  lines w10: 990,2515 990,5005 3855,5005 3860,5005 3860,2515 990,2515

## Text inside footprints (layer, text, board x,y; h text height)
U1: Top Overlay "VCC" at 2810,2822.95 h60 r90